# EAGLE board balanceador_arduino (EAGLE 7.6.0)
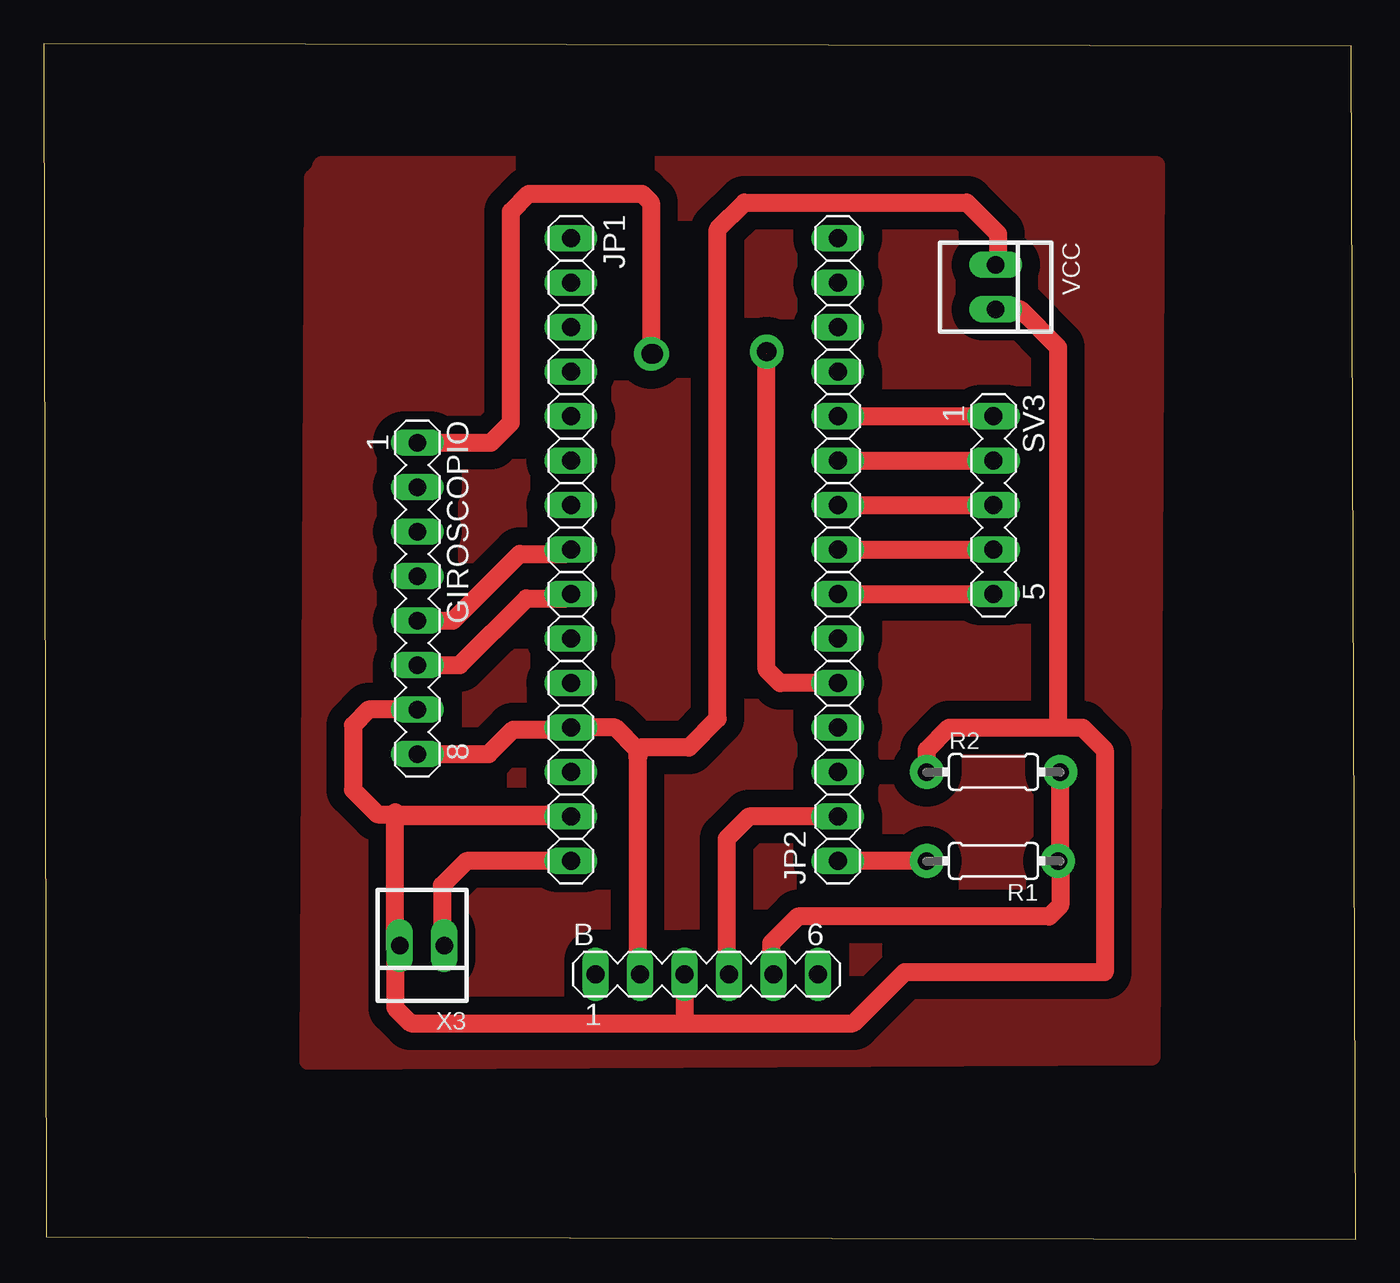
[diagram p0: board, top side]
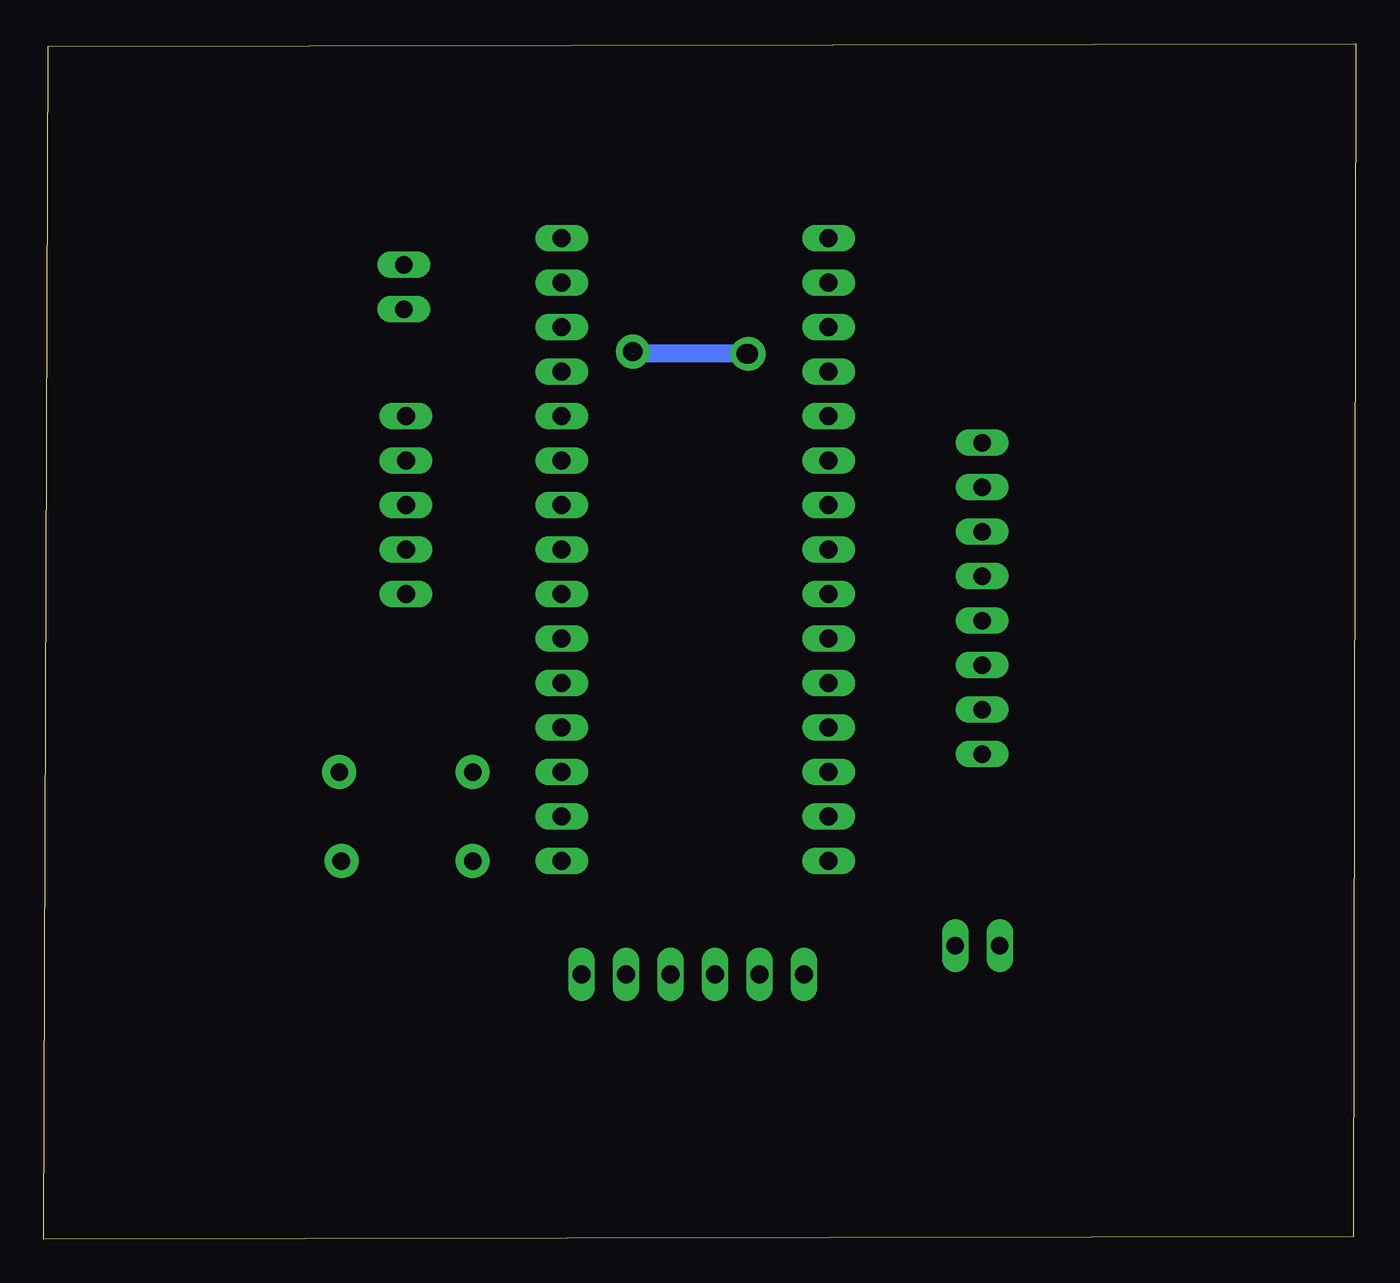
[diagram p1: board, bottom side, seen from below]

Size 74.91 x 68.25 mm. Coordinates in mm from the lower left corner, seen from the top.
Outline: 0.13,0.13 74.91,0 74.66,68.12 0,68.25 0.13,0.13
Copper layers (1*16): Top 0.035mm / dielectric 1.5mm / Bottom 0.035mm
Design rules "default": minimum track width 10mil, minimum drill 24mil, track to track 8mil, track to pad 8mil, pad to pad 8mil, via to via 8mil, smd to smd 8mil, copper to edge 40mil, drill to drill 8mil, minimum pad ring 10mil, minimum via ring 8mil, stop-mask expansion 4mil, vias tented up to drill 0mil, thermal gap 10mil

## Footprints (pad centres in the part's own frame; a part is rotated, then mirrored left to right if it is on the bottom)
MA06-1 = drill 1.016 long: 1 -6.35,0; 2 -3.81,0; 3 -1.27,0; 4 1.27,0; 5 3.81,0; 6 6.35,0
MA08-1 = drill 1.016 long: 1 -8.89,0; 2 -6.35,0; 3 -3.81,0; 4 -1.27,0; 5 1.27,0; 6 3.81,0; 7 6.35,0; 8 8.89,0
1X15 = drill 1.016 long: 1 -17.78,0; 2 -15.24,0; 3 -12.7,0; 4 -10.16,0; 5 -7.62,0; 6 -5.08,0; 7 -2.54,0; 8 0,0; 9 2.54,0; 10 5.08,0; 11 7.62,0; 12 10.16,0; 13 12.7,0; 14 15.24,0; 15 17.78,0
0204/7 = drill 0.813 octagon: 1 -3.81,0; 2 3.81,0
MA05-1 = drill 1.016 long: 1 -5.08,0; 2 -2.54,0; 3 0,0; 4 2.54,0; 5 5.08,0
22-23-2021 = drill 1 long: 1 -1.27,0; 2 1.27,0

## Placement (x,y rotation side)
B  [MA06-1]  37.85,15.11 0 top
GIROSCOPIO  [MA08-1]  21.34,36.58 270 top
JP1  [1X15]  30.1,39.37 270 top
JP2  [1X15]  45.34,39.37 90 top
R1  1k  [0204/7]  54.23,21.59 180 top
R2  2k  [0204/7]  54.23,26.67 0 top
SV3  [MA05-1]  54.23,41.91 270 top
VCC  22-23-2021  [22-23-2021]  54.36,54.36 270 top
X3  22-23-2021  [22-23-2021]  21.59,16.76 180 top

## Library data of the parts
B GIROSCOPIO SV3 = con-lstb; OC_FARNELL: unknown; OC_NEWARK: unknown
JP1 JP2 = pinhead
R1 R2 = resistor
VCC X3 = con-molex; MF: MOLEX; MPN: 22-23-2021; OC_FARNELL: 1462926; OC_NEWARK: 25C3832

## Nets
D4: JP2.7 SV3.5
GND: B.3 GIROSCOPIO.7 JP1.14 R2.1 VCC.2 X3.2
N$1: B.5 R1.1 R2.2
N$2: GIROSCOPIO.6 JP1.9
N$3: GIROSCOPIO.5 JP1.8
N$4: JP2.1 R1.2
N$5: B.4 JP2.2
N$6: GIROSCOPIO.1 JP2.5
N$8: JP2.8 SV3.4
N$9: JP2.9 SV3.3
N$10: JP2.10 SV3.2
N$11: JP2.11 SV3.1
N$12: JP1.15 X3.1
VCC: B.2 GIROSCOPIO.8 JP1.12 VCC.1

## Tracks (layer width: path | path; a pad name or v marks a point on that pad's centre or on a via)
D4
  Top 1.016: JP2.7 SV3.5
GND
  Top 1.016: R2.1 50.42,27.94 51.69,29.21 57.78,29.21 | 57.78,29.21 59.31,29.21 60.58,27.94 60.58,15.24 49.15,15.24 46.23,12.32 36.32,12.32 | GIROSCOPIO.7 18.54,30.23 17.65,29.34 17.65,25.65 19.05,24.26 20.07,24.26 | 20.07,24.26 29.97,24.26 JP1.14 20.32,24.13 20.07,24.38 | VCC.2 55.75,53.09 57.91,50.93 57.91,29.34 57.78,29.21 | 20.07,16.51 20.07,24.26 | 20.07,16.51 X3.2 | 20.07,16.51 20.07,13.21 20.95,12.32 36.32,12.32 | B.3 36.58,12.57 36.32,12.32
N$1
  Top 1.016: R2.2 R1.1 58.04,19.05 57.4,18.41 43.05,18.41 41.53,16.89 41.53,15.24 B.5
N$2
  Top 1.016: GIROSCOPIO.6 23.75,32.77 27.56,36.58 29.84,36.58 JP1.9
N$3
  Top 1.016: GIROSCOPIO.5 23.37,35.31 27.18,39.12 29.84,39.12 JP1.8
N$4
  Top 1.016: R1.2 JP2.1
N$5
  Top 1.016: JP2.2 40.26,24.13 38.99,22.86 38.99,15.24 B.4
N$6  (via drill 1.1 pad 1.78)  (1 unrouted)
  Top 1.016: GIROSCOPIO.1 25.53,45.47 26.67,46.61 26.67,58.67 27.69,59.69 34.16,59.69 34.67,59.18 34.67,50.67 v34.8,50.55 | JP2.5 42.04,31.75 41.28,32.51 41.28,50.55 41.4,50.67
  Bottom 1.016: v34.8,50.55 41.28,50.55
N$8
  Top 1.016: JP2.8 SV3.4
N$9
  Top 1.016: JP2.9 SV3.3
N$10
  Top 1.016: JP2.10 SV3.2
N$11
  Top 1.016: JP2.11 SV3.1
N$12
  Top 1.016: JP1.15 24.13,21.59 22.73,20.19 22.73,16.89 X3.1
N$13  (via drill 1.1 pad 1.78)
  other vias: 34.67,50.55
N$14  (via drill 1.1 pad 1.78)
  other vias: 41.28,50.67
N$15  (via drill 1 pad 1.93)
  other vias: 58.04,26.67
N$16  (via drill 1 pad 1.93)
  other vias: 50.42,21.59
N$17  (via drill 1 pad 1.93)
  other vias: 50.42,26.67
N$18  (via drill 1 pad 1.93)
  other vias: 57.91,21.59
N$19  (via drill 1 pad 1.93)
  other vias: 34.67,50.55
N$20  (via drill 1 pad 1.93)
  other vias: 41.28,50.67
N$21
  pour Top (isolate 1.016): 15.75,60.96 15.88,61.34 63.5,61.34 63.25,10.41 15.11,10.16 15.37,60.58
VCC
  Top 1.016: 33.91,27.43 33.91,27.94 32.64,29.21 JP1.12 29.97,29.08 26.8,29.08 25.4,27.69 GIROSCOPIO.8 | 33.91,27.43 34.04,28.07 36.83,28.07 38.48,29.72 38.48,57.66 40,59.18 52.7,59.18 54.48,57.4 54.48,55.75 VCC.1 | 33.91,27.43 33.91,15.24 B.2